# Altium PCB Conn_Batt_Bullet_F_7mm.PcbDoc
Units mm, origin at the board's own origin, x right, y up, seen from the top; angles counter-clockwise.
Board outline 7 x 36 mm, 2 copper layers (Component Side, Solder Side), stack 1.57 mm thick; 3 components, 7 nets, 3 pads, 0 vias.
Unrouted connection lines stored in the file: 6.
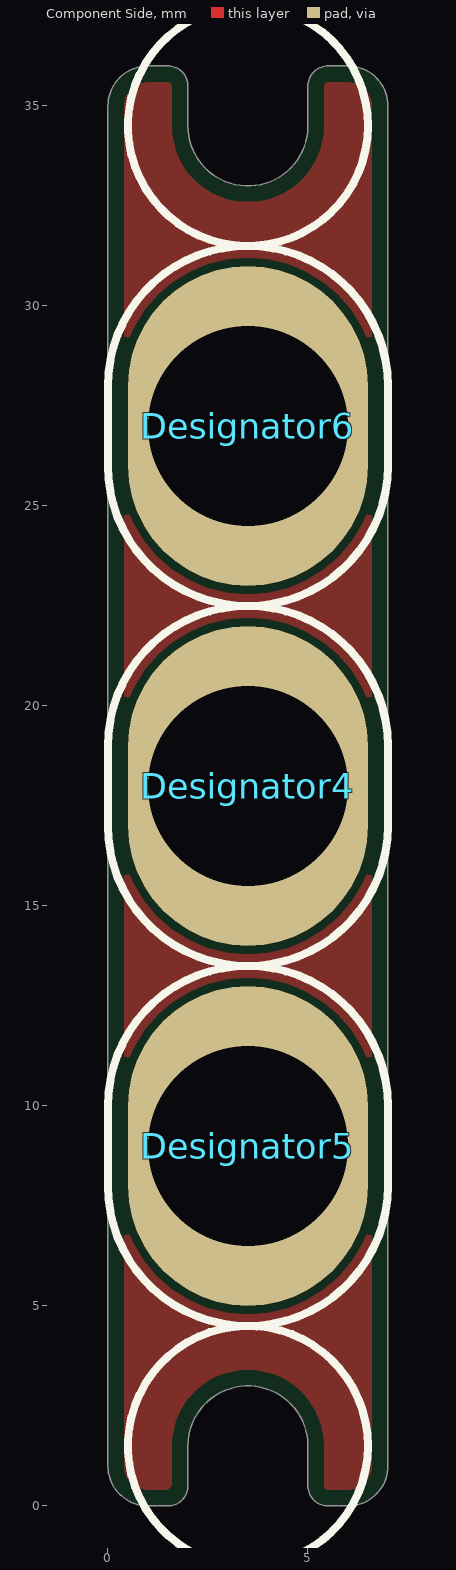
[diagram p0: Component Side view]
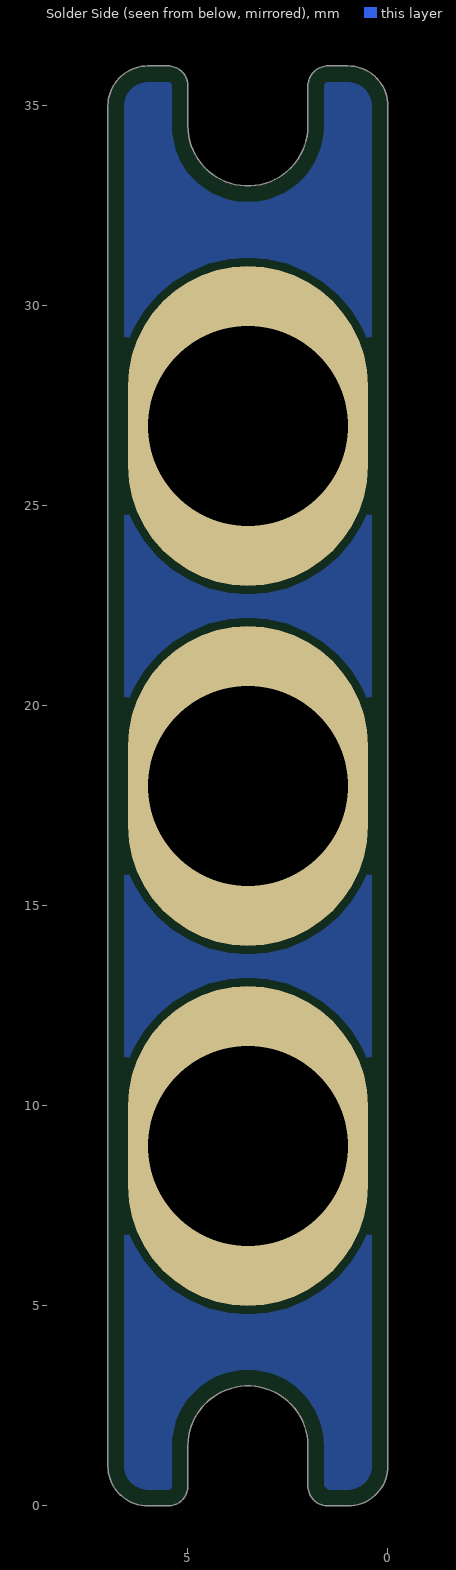
[diagram p1: Solder Side view, seen from below]

## Layer stack, top to bottom
Top Solder: solder mask 0.01, Solder Resist, Dk 3.5
Component Side: signal copper 0.035
Dielectric 1: core 1.5, FR-4, Dk 4.8
Solder Side: signal copper 0.035
Bottom Solder: solder mask 0.01, Solder Resist, Dk 3.5

## Board outline
0,1 ccw(c1,1) 1,0 1.5,0 ccw(c1.5,0.5) 2,0.5 2,1.5 cw(c3.5,1.5) 5,1.5 5,0.5 ccw(c5.5,0.5) 5.5,0 6,0 ccw(c6,1) 7,1 7,0.998 7,35 ccw(c6,35) 6,36 5.5,36 ccw(c5.5,35.5) 5,35.5 5,34.5 cw(c3.5,34.5) 2,34.5 2,35.5 ccw(c1.5,35.5) 1.5,36 1,36 ccw(c1,35) 0,35

## Design rules (kind name [scope] priority, off if disabled: settings)
AssemblyTestPointUsage [All] p1 off:
AssemblyTestpoint [All] p1 off: testpointundercomponent=TRUE minsize=1.016 maxsize=2.54 preferedsize=1.524 minholesize=0 maxholesize=1.016 preferedholesize=0.813 testpointgrid=0.025 usegrid=TRUE gridtolerance=0 allowsidetop=TRUE allowsidebottom=TRUE
BoardOutlineClearance [All] p1: gap=0.4 ignorepadtopadclearanceinfootprint=FALSE
Clearance Clearance_polygon [InPolygon] p1: gap=0.2 ignorepadtopadclearanceinfootprint=FALSE except(0: Arc-Hole Track-Hole SMDPad-Hole THPad-Hole Via-Hole Fill-Hole Poly-Hole Region-Hole Text-Hole)
Clearance Clearance_for_power_net [InNetClass('Power') vs InNet('GND')] p2: gap=0.2 ignorepadtopadclearanceinfootprint=TRUE except(0: Arc-Hole Track-Hole SMDPad-Hole THPad-Hole Via-Hole Fill-Hole Poly-Hole Region-Hole Text-Hole)
Clearance Clearance_general [All] p3: gap=0.127 ignorepadtopadclearanceinfootprint=FALSE except(0: Arc-Hole Track-Hole SMDPad-Hole THPad-Hole Via-Hole Fill-Hole Poly-Hole Region-Hole Text-Hole)
ComponentClearance [All] p1: gap=0 collisioncheckmode=3 verticalgap=0 showdistances=FALSE
DiffPairsRouting [All] p1 off: maxlimit=0.254 minlimit=0.127 mostfreqgap=0.254 toplayer_minwidth=0.381 toplayer_maxwidth=0.381 toplayer_prefwidth=0.381 bottomlayer_minwidth=0.381 bottomlayer_maxwidth=0.381 bottomlayer_prefwidth=0.381 maxuncoupledlength=12.7
FabricationTestPointUsage TestPointUsage [All] p1 off: valid=0 allowmultiple=FALSE
FabricationTestpoint Testpoint [All] p1 off: side=3 testpointundercomponent=TRUE minsize=1.016 maxsize=2.54 preferedsize=1.524 minholesize=0 maxholesize=1.016 preferedholesize=0.813 testpointgrid=0.025 allowsidetop=TRUE allowsidebottom=TRUE usegrid=TRUE gridtolerance=0
FanoutControl Fanout_BGA [IsBGA] p1 off: bgadir=Out bgaviamode=Centered fanoutstyle=Auto fanoutdirection=Alternating viagrid=0.025 // Fanout_BGA (Default Rule)
FanoutControl Fanout_LCC [IsLCC] p2 off: bgadir=Out bgaviamode=Centered fanoutstyle=Auto fanoutdirection=Alternating viagrid=0.025 // Fanout_LCC (Default Rule)
FanoutControl Fanout_SOIC [IsSOIC] p3 off: bgadir=Out bgaviamode=Centered fanoutstyle=Auto fanoutdirection=Alternating viagrid=0.025 // Fanout_SOIC (Default Rule)
FanoutControl Fanout_Small [(CompPinCount < 5)] p4 off: bgadir=Out bgaviamode=Centered fanoutstyle=Auto fanoutdirection=OutThenIn viagrid=0.025 // Fanout_Small (Default Rule)
FanoutControl Fanout_Default [All] p5 off: bgadir=Out bgaviamode=Centered fanoutstyle=Auto fanoutdirection=Alternating viagrid=0.025 // Fanout_Default (Default Rule)
Height [All] p1: minheight=0 maxheight=50 prefheight=10
HoleSize [All] p1: absolutevalues=TRUE maxlimit=6.3 minlimit=0.2 maxpercent=80.000 minpercent=20.000
HoleToHoleClearance [All] p1: gap=0.4 allowstackedmicrovias=TRUE
MinimumAnnularRing [All] p1: minimumring=0.076
MinimumSolderMaskSliver [All] p1: minsoldermaskwidth=0.15
MinimumSolderMaskSliver SilkscreenOverComponentPads [All] p2 off: minsoldermaskwidth=0.254
NetAntennae [All] p1 off: netantennaetolerance=0
PlaneClearance [All] p1: clearance=0.5
PlaneConnect [All] p1: planeconnectstyle=Relief reliefexpansion=0.4 reliefentries=4 reliefconductorwidth=0.3 reliefairgap=0.2
PolygonConnect [All] p1: thpad.connectstyle=Relief thpad.reliefconductorwidth=0.25 thpad.reliefentries=4 thpad.polygonreliefangle="90 Angle" thpad.airgapwidth=0.254 smdpad.connectstyle=Relief smdpad.reliefconductorwidth=0.25 smdpad.reliefentries=4 smdpad.polygonreliefangle="90 Angle" smdpad.airgapwidth=0.254 via.connectstyle=Direct via.reliefconductorwidth=0.25 via.reliefentries=4 via.polygonreliefangle="90 Angle" via.airgapwidth=0.254
PolygonConnect PolygonConnect_Via_GND [All vs (InNet('GND') AND  IsVia)] p2: thpad.connectstyle=Relief thpad.reliefconductorwidth=0.25 thpad.reliefentries=4 thpad.polygonreliefangle="90 Angle" thpad.airgapwidth=0.254 smdpad.connectstyle=Relief smdpad.reliefconductorwidth=0.25 smdpad.reliefentries=4 smdpad.polygonreliefangle="90 Angle" smdpad.airgapwidth=0.254 via.connectstyle=Direct via.reliefconductorwidth=0.25 via.reliefentries=4 via.polygonreliefangle="90 Angle" via.airgapwidth=0.254
PolygonConnect PolygonConnect_Via_Power [(InNetClass('Power')  AND  IsVia)] p3: connectstyle=Relief reliefconductorwidth=0.25 reliefentries=4 polygonreliefangle="90 Angle" airgapwidth=0.254
RoutingCorners [All] p1: cornerstyle=45-Degree minsetback=1.5 maxsetback=2.54
RoutingVias [All] p1: holewidth=0.3 width=0.6 viastyle="Through Hole" minholewidth=0.3 minwidth=0.6 maxholewidth=0.3 maxwidth=1
SilkToSilkClearance [All] p1 off: silktosilkclearance=0.1
SolderMaskExpansion [All] p1: expansion=0.075 istentingtop=FALSE
Width [All] p1: maxlimit=15 minlimit=0.127 preferedwidth=0.5
10 further rules are at their usual default settings.

## Classes and differential pairs
net class TrigSchmit: 3L Capteur GND OPB_S
net class LDO: 3L 5P GND
net class FourcheOpt: 3L GND OPB_A OPB_S
net class Connector: 5P Capteur GND Servo

## Components (designator, comment, footprint, x,y, rotation, side; value= is the part's Value field where it differs from the comment)
Designator4 "Comment" CONN_Bullet-3.5-F 3.5,18 r0 top
Designator5 "Comment" CONN_Bullet-4-F 3.5,9 r0 top
Designator6 "Comment" CONN_Bullet-4-F 3.5,27 r0 top

## Footprints (in the part's own frame and the unit in brackets; to place one, negate y for a bottom-side part, rotate by r counter-clockwise, add the part's x,y. Pads: shape width x height; smd on the part's side, far side on the other; paste and mask are expansions set on the pad)
CONN_Bullet-3.5-F [mm] "bullet connector  3,5mm femelle"
  oval 6x8 hole 5: 1(0,0)
  silkscreen extent -3.5,-4.5 3.5,4.5, body extent -2.4,-2.4 2.4,2.4, height 9.65
CONN_Bullet-4-F [mm] "bullet connector 4mm femelle"
  oval 6x8 hole 5: 1(0,0)
  silkscreen extent -3.5,-4.5 3.5,4.5, body extent -2.4,-2.4 2.4,2.4, height 10

## Nets (pads, with @x,y where several pads share a name; then routed paths per layer and width w, separated by ;. In a path a pad name is that pad's centre, name@x,y a point inside that pad or via, vN(x,y) a via of type N, cw(c..) or ccw(c..) an arc to the next point about the centre after c; other vN are vias at no path point)
3L: 
5P: 
Capteur: 
GND: 
OPB_A: 
OPB_S: 
Servo: 
pads on no net: Designator4.1 Designator5.1 Designator6.1

## Polygon pours and split planes (outlines as drawn)
no net on Component Side "NONET_L01_P000" (solid, pour order 0): 0,36 7,36 7,0 0,0
no net on Solder Side "NONET_L02_P001" (solid, pour order 1): 0,36 7,36 7,0 0,0

## Silkscreen, mask and mechanical layers (free items; w line width, h text height)
Top Overlay:
  circle w0.2: c3.5,34.5 r3
  circle w0.2: c3.5,1.5 r3
Board Outline:
  lines w0.1: 7,0.998 7,35 ccw(c6,35) 6,36 5.5,36 ccw(c5.5,35.5) 5,35.5 5,34.5 cw(c3.5,34.5) 2,34.5 2,35.5 ccw(c1.5,35.5) 1.5,36 1,36 ccw(c1,35) 0,35 0,1 ccw(c1,1) 1,0 1.5,0 ccw(c1.5,0.5) 2,0.5 2,1.5 cw(c3.5,1.5) 5,1.5 5,0.5 ccw(c5.5,0.5) 5.5,0 6,0 ccw(c6,1) 7,1

## Dimensions
0,35 to 7,35 on Dimension
1,0 to 1,36 on Dimension